# EAGLE board untitled (EAGLE 6.1)
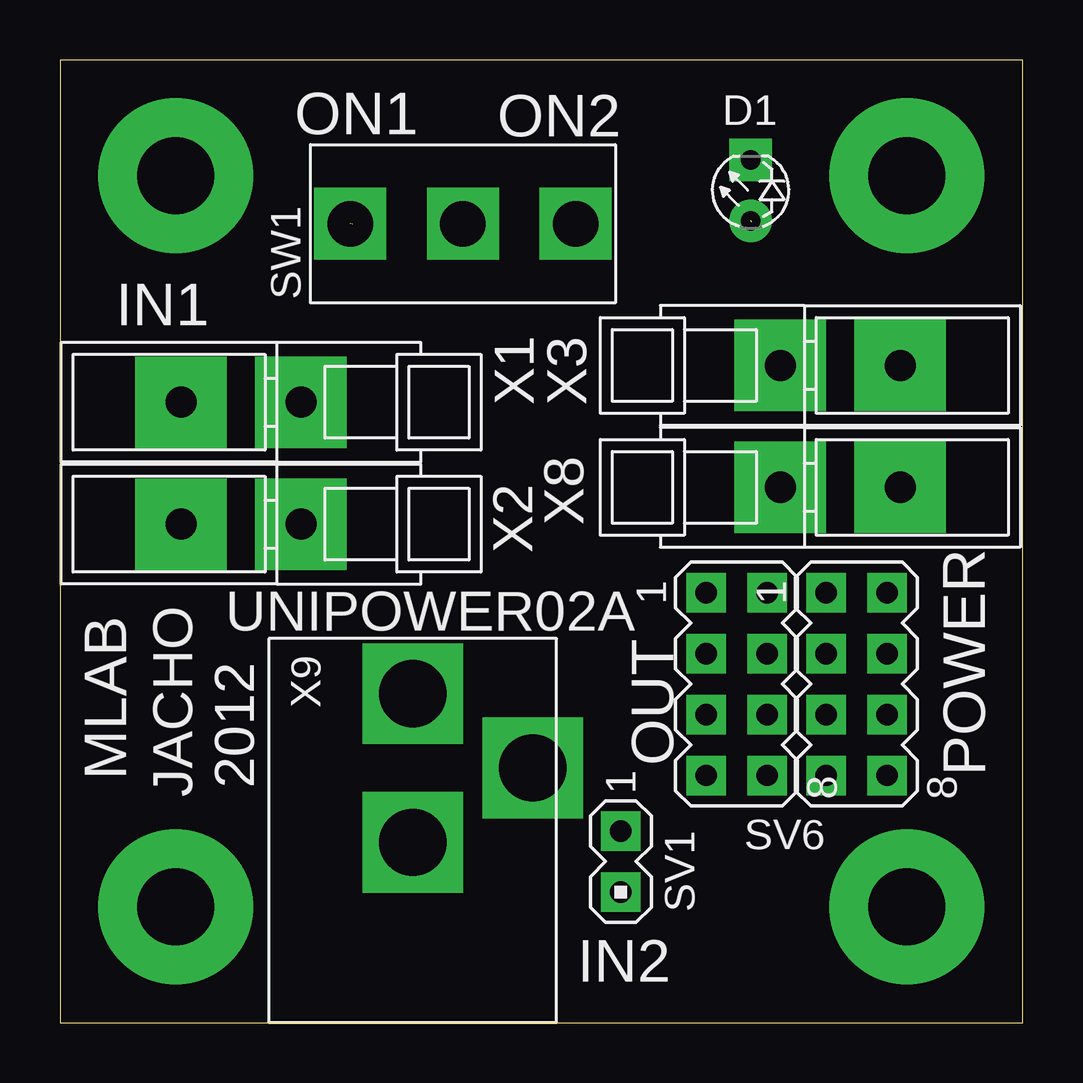
[diagram p0: board, top side]
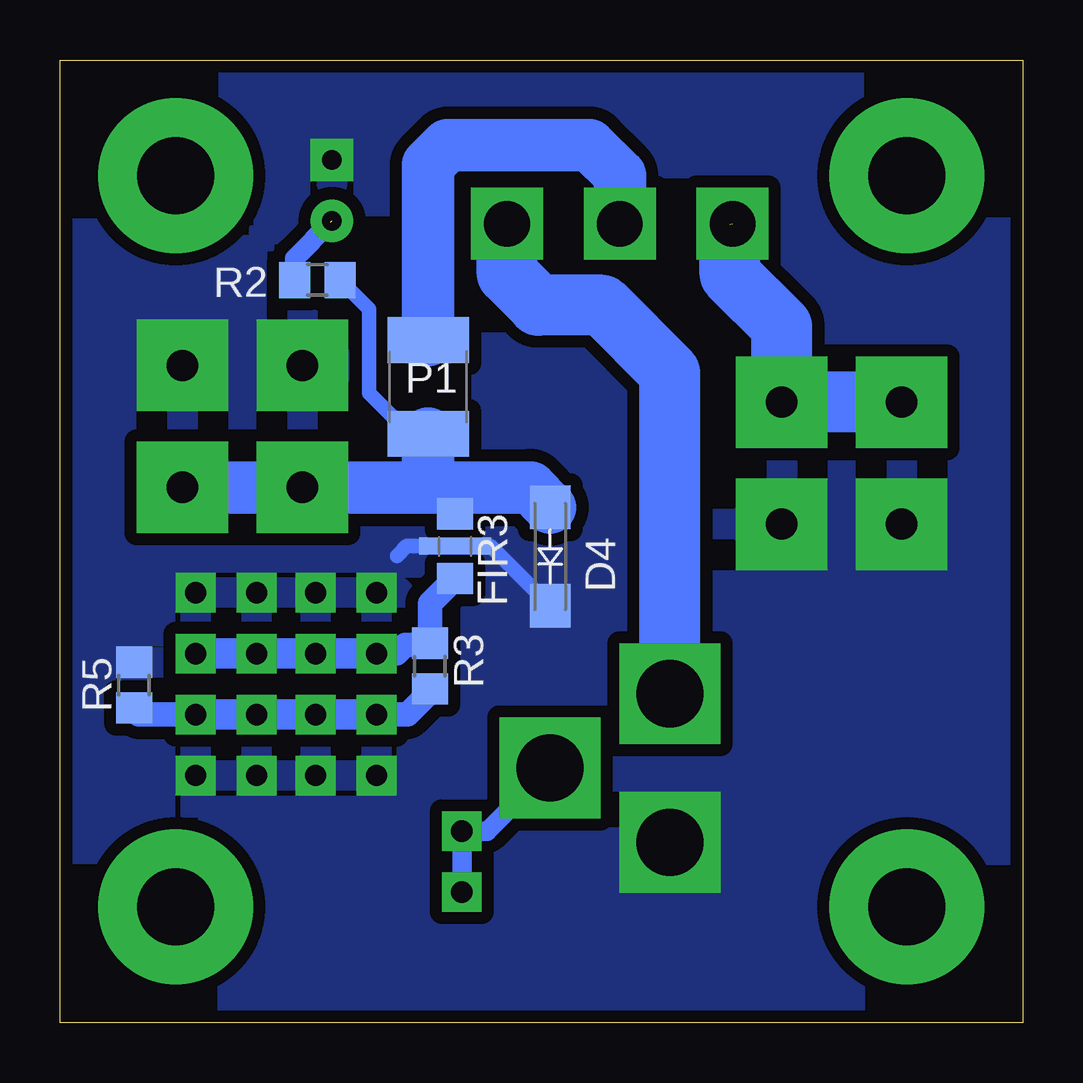
[diagram p1: board, bottom side, seen from below]

Size 40.13 x 40.13 mm. Coordinates in mm from the lower left corner, seen from the top.
Outline: 0,0 40.13,0 40.13,40.13 0,40.13 0,0
Copper layers (1*16): Top 0.035mm / dielectric 1mm / Bottom 0.035mm
Design rules: minimum track width 12mil, minimum drill 24mil, track to track 20mil, track to pad 20mil, pad to pad 20mil, via to via 20mil, smd to smd 8mil, copper to edge 20mil, drill to drill 70mil, minimum pad ring 10mil, minimum via ring 8mil, stop-mask expansion 5mil, vias tented up to drill 0mil, thermal gap 0mil

## Footprints (pad centres in the part's own frame; a part is rotated, then mirrored left to right if it is on the bottom)
D_LED_3 = drill 0.813 pad 1.778: A -1.27,0 | drill 0.813 pad 1.778 square: K 1.27,0
SMA = smd 1.8 x 1.7: A -2.05,0; K 2.05,0
F0805 = smd 1.3 x 1.5: 1 -1.35,0; 3 1.35,0 | smd 0.7 x 3: 2 0,0
1812 = smd 1.9 x 3.4: 1 -1.95,0; 2 1.95,0
R0805 = smd 1.3 x 1.5: 1 -0.95,0; 2 0.95,0
MA02-1 = drill 0.889 pad 1.651 square: 1 -1.27,0; 2 1.27,0
MA04-2 = drill 0.889 pad 1.651 square: 1 -3.81,-1.27; 2 -3.81,1.27; 3 -1.27,-1.27; 4 -1.27,1.27; 5 1.27,-1.27; 6 1.27,1.27; 7 3.81,-1.27; 8 3.81,1.27
PREPINAC-POSUVNÝ = drill 1.9 pad 3 square: 1 0,4.7; 2 0,0; 3 0,-4.7
WAGO256 = drill 1.3 pad 3.81 square: 1 0,0; A1 -5,0
SROUB3M = drill 3.2 pad 6.452: P$1 0,0
KONEKTOR_DC_2.1MM = drill 2.8 square: + 0,0; GND 3.1,5; GND1 6.2,0

## Placement (x,y rotation side)
D1  [D_LED_3]  28.8,34.7 90 top
D4  M4  [SMA]  19.7,19.44 270 bottom
FIR3  [F0805]  23.67,19.87 270 bottom
P1  [1812]  24.79,26.51 270 bottom
R2  [R0805]  29.41,30.96 0 bottom
R3  0R pro 12V  [R0805]  24.71,14.87 90 bottom
R5  0R pro 5V  [R0805]  37.05,14.08 90 bottom
SV1  [MA02-1]  23.38,6.72 270 top
SV5  JUMP2*4  [MA04-2]  28.21,14.12 270 top
SV6  JUMP2X4  [MA04-2]  33.21,14.12 270 top
SW1  [PREPINAC-POSUVNÝ]  16.8,33.31 270 top
X1  WAGO256  [WAGO256]  10.05,25.87 0 top
X2  WAGO256  [WAGO256]  10.05,20.79 0 top
X3  WAGO256  [WAGO256]  30.03,27.4 180 top
X4  M3  [SROUB3M]  35.31,35.31 0 top
X5  M3  [SROUB3M]  4.83,35.31 0 top
X6  M3  [SROUB3M]  35.31,4.83 0 top
X7  M3  [SROUB3M]  4.83,4.83 0 top
X8  WAGO256  [WAGO256]  30.03,22.32 180 top
X9  DC 2.1MM  [KONEKTOR_DC_2.1MM]  14.71,13.72 270 top

## Library data of the parts
D1 D4 FIR3 P1 SW1 X4-X7 X9 = moje
R2 R3 R5 = rcl
SV1 = moje_hrebinky
SV5 SV6 = con-lstb; OC_FARNELL: unknown; OC_NEWARK: unknown
X1-X3 X8 = PaJa_22

## Nets
+12V: SW1.1 X9.+
GND12: D1.K D4.K FIR3.2 R5.2 SV5.1 SV5.2 SV5.7 SV5.8 SV6.1 SV6.2 SV6.7 SV6.8 X2.1 X2.A1 X3.1 X3.A1 X9.GND1
N$1: SW1.3 X1.1 X1.A1
N$2: D1.A R2.1
N$4: R3.1 R5.1 SV5.5 SV5.6 SV6.5 SV6.6
N$5: SV1.1 SV1.2 X9.GND
N$6: FIR3.3 R3.2 SV5.3 SV5.4 SV6.3 SV6.4
N$7: P1.1 SW1.2
N$9: D4.A FIR3.1 P1.2 R2.2 X8.1 X8.A1
N$13: X6.P$1
N$14: X4.P$1
N$15: X7.P$1
N$16: X5.P$1

## Tracks (layer width: path | path; a pad name or v marks a point on that pad's centre or on a via)
+12V
  Bottom 2.54: X9.+ 14.71,27.09 17.53,29.91 20.19,29.91 21.5,31.22 SW1.1
GND12
  Bottom 0.61: D4.K 22.18,19.87 FIR3.2 25.68,19.87 26.09,19.46
  Bottom 2.54: 15.18,7.35 X9.GND1
  pour Bottom: -0.14,-0.42 40.46,-0.42 40.46,-0.31 40.29,-0.31 40.29,40.42 -0.25,40.42 -0.25,-0.31
N$1  (1 unrouted)
  Bottom 2.54: X1.A1 X1.1 10.05,29.04 12.2,31.19 12.2,33.3
N$2  (1 unrouted)
  Bottom 0.813: R2.1 30.36,31.86 28.85,33.37
N$4
  Bottom 1.016: SV5.5 25.65,12.85 24.75,13.75 24.75,13.88 R3.1 | SV6.6 36.85,12.85 37.25,13.25 37.17,13.25 R5.1
  Bottom 1.27: SV5.5 SV5.6 SV6.5 SV6.6
N$5
  Bottom 0.305: 19.67,10.66 X9.GND
  Bottom 0.813: SV1.2 SV1.1 22.34,7.99 X9.GND
N$6
  Bottom 1.016: FIR3.3 24.71,17.48 R3.2 24.78,15.75 25.75,15.75 26.11,15.39 SV5.3
  Bottom 1.27: SV5.3 SV5.4 SV6.3 SV6.4
N$7
  Bottom 2.184: SW1.2 16.8,35.33 18.06,36.59 23.97,36.59 24.79,35.77 P1.1
N$9
  Bottom 0.61: P1.2 25.56,24.56 27.25,26.25 27.25,29.75 R2.2
  Bottom 0.813: FIR3.1 23.67,22.24 23.75,22.32
  Bottom 1.27: FIR3.1
  Bottom 2.184: X8.A1 X8.1 24.75,22.32 | 24.75,22.32 23.75,22.32 20.53,22.32 D4.A | P1.2 24.79,22.36 24.75,22.32

## Text on the board
tPlace: ON1 | ON2 | IN1 | JACHO | UNIPOWER02A | OUT | POWER | MLAB | 2012 | IN2
bNames: R2 | P1 | FIR3 | D4 | R3 | R5